# EAGLE board Motor (EAGLE 6.6.0)
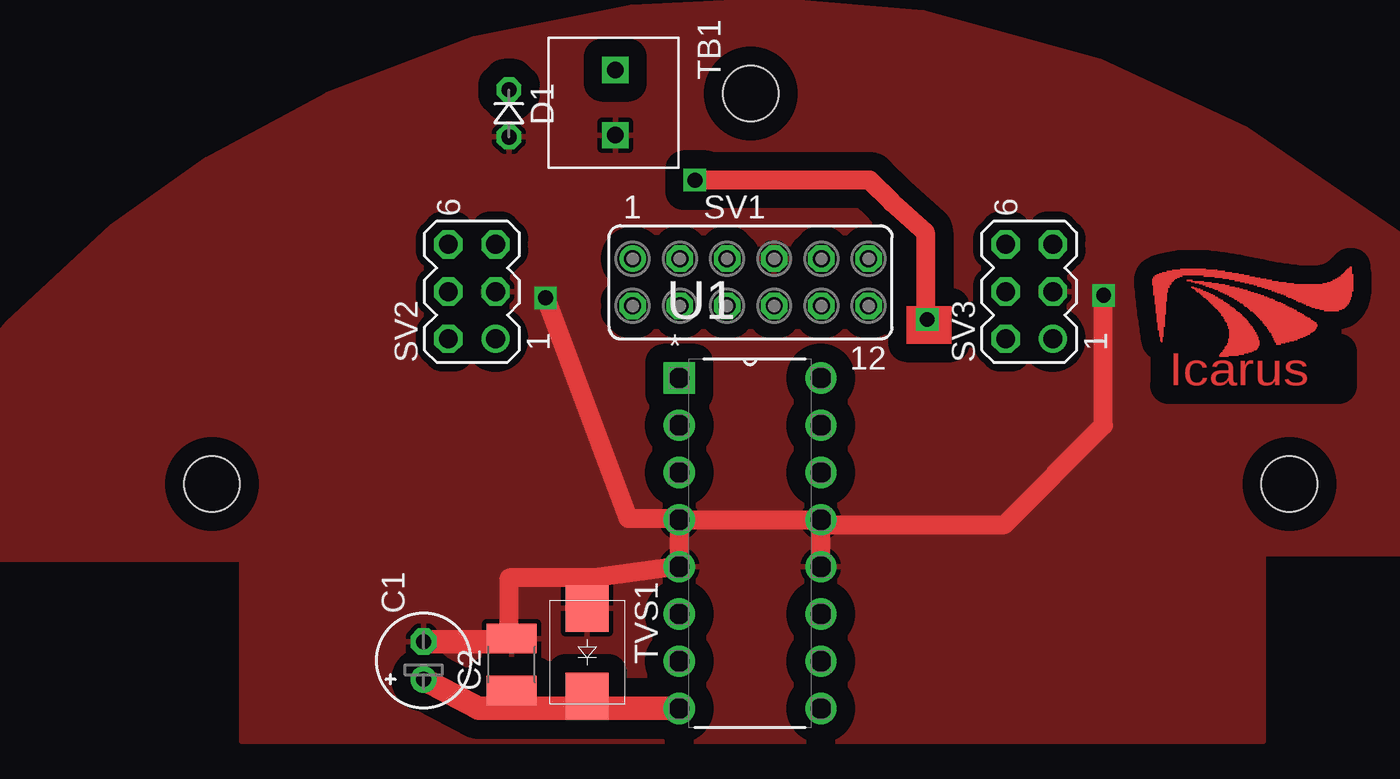
[diagram p0: board, top side]
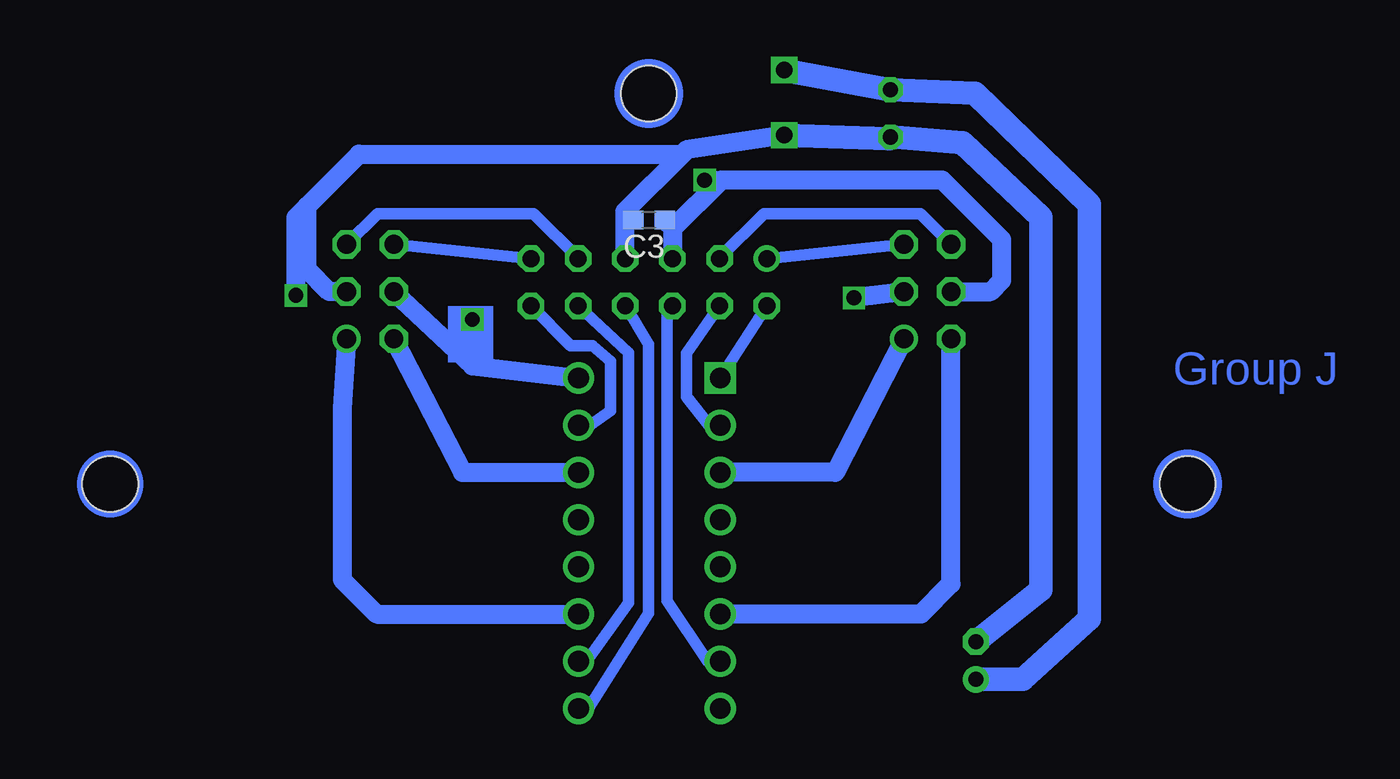
[diagram p1: board, bottom side, seen from below]

No outline drawn. Coordinates in mm, seen from the top.
Copper layers (1*16): Top 0.035mm / dielectric 1.5mm / Bottom 0.035mm
Design rules "default": minimum track width 10mil, minimum drill 24mil, track to track 8mil, track to pad 8mil, pad to pad 8mil, via to via 8mil, smd to smd 8mil, copper to edge 40mil, drill to drill 8mil, minimum pad ring 10mil, minimum via ring 8mil, stop-mask expansion 4mil, vias tented up to drill 0mil, thermal gap 10mil
Holes 3 mm at -29,22.65 29,22.65 0,43.65

## Footprints (pad centres in the part's own frame; a part is rotated, then mirrored left to right if it is on the bottom)
E2-5 = drill 0.813 pad 1.422: + -1.016,0 | drill 0.813 pad 1.422 octagon: - 1.016,0
C1210 = smd 1.6 x 2.7: 1 -1.4,0; 2 1.4,0
C0603 = smd 1.1 x 1: 1 -0.85,0; 2 0.85,0
D-2.5 = drill 0.813 octagon: A 1.27,0; C -1.27,0
FE06-2 = drill 0.914: 1 -6.35,1.27 | drill 0.914 octagon: 2 -6.35,-1.27; 3 -3.81,1.27; 4 -3.81,-1.27; 5 -1.27,1.27; 6 -1.27,-1.27; 7 1.27,1.27; 8 1.27,-1.27; 9 3.81,1.27; 10 3.81,-1.27; 11 6.35,1.27; 12 6.35,-1.27
MA03-2 = drill 1.016: 1 -2.54,-1.27 | drill 1.016 octagon: 2 -2.54,1.27; 3 0,-1.27; 4 0,1.27; 5 2.54,-1.27; 6 2.54,1.27
TERMINAL_BLOCK_2W = drill 0.9 square: P$1 1.75,3.6; P$2 5.25,3.6
SMBJA = smd 2.5 x 2.3: ANO -2.35,0; CAT 2.35,0
DIP254P762X508-16 = drill 1.118 square: 1 -7.62,17.78 | drill 1.118: 2 -7.62,15.24; 3 -7.62,12.7; 4 -7.62,10.16; 5 -7.62,7.62; 6 -7.62,5.08; 7 -7.62,2.54; 8 -7.62,0; 9 0,0; 10 0,2.54; 11 0,5.08; 12 0,7.62; 13 0,10.16; 14 0,12.7; 15 0,15.24; 16 0,17.78

## Placement (x,y rotation side)
C1  100u  [E2-5]  -17.6,13.15 90 top
C2  10u  [C1210]  -12.87,12.93 90 top
C3  [C0603]  0,36.85 180 bottom
D1  [D-2.5]  -13.01,42.59 270 top
SV1  [FE06-2]  0,33.5 0 top
SV2  [MA03-2]  -15,33 90 top
SV3  [MA03-2]  15,33 90 top
TB1  TERMINAL-BLOCK-2W  [TERMINAL_BLOCK_2W]  -10.88,46.67 270 top
TVS1  TVS_BIDIR  [SMBJA]  -8.8,13.6 270 top
U1  L293DNE  [DIP254P762X508-16]  3.78,10.57 0 top

## Library data of the parts
C1-C3 = adafruit
D1 = diode
SV1 = con-lsta; OC_FARNELL: unknown; OC_NEWARK: unknown
SV2 SV3 = con-lstb; OC_FARNELL: unknown; OC_NEWARK: unknown
TB1 TVS1 = GFL_Micromouse
U1 = GFL_Micromouse; MPN: L293DNE; OC_FARNELL: 1470423; OC_NEWARK: 06F9523; PACKAGE: PDIP-16; SUPPLIER: Texas Instruments

## Nets
+7V: C1.+ C2.1 D1.C TB1.P$1 TVS1.CAT U1.8
DIR1A: SV1.4 U1.2
DIR1B: SV1.6 U1.7
DIR2A: SV1.10 U1.10
DIR2B: SV1.12 U1.15
ENC1A: SV1.3 SV2.6
ENC1B: SV1.1 SV2.5
ENC2A: SV1.11 SV3.6
ENC2B: SV1.9 SV3.5
GND: C1.- C2.2 C3.2 D1.A SV1.7 SV2.3 SV3.3 TB1.P$2 TVS1.ANO U1.4 U1.5 U1.12 U1.13
MOTOR1+: SV2.2 U1.6
MOTOR1-: SV2.1 U1.3
MOTOR2+: SV3.2 U1.14
MOTOR2-: SV3.1 U1.11
PWM1: SV1.2 U1.1
PWM2: SV1.8 U1.9
VDD: C3.1 SV1.5 SV2.4 SV3.4 U1.16

## Tracks (layer width: path | path; a pad name or v marks a point on that pad's centre or on a via)
+7V
  Top 1.27: C1.+ -14.63,10.57 -13,10.57 | -13,10.57 -8.6,10.57 | -8.6,10.57 U1.8 | C2.1 -13,11.41 -13,10.57 | TVS1.CAT -8.6,11.65 -8.6,10.57
  Bottom 1.016: D1.C -12.94,43.86
  Bottom 1.27: -12.94,43.86 TB1.P$1 | D1.C -17.54,43.66 -23.7,37.7 -23.7,15.4 -20.14,12.14 C1.+
DIR1A
  Bottom 0.61: SV1.4 -2.03,29.7 -2.03,27.34 -3.23,25.81 U1.2
DIR1B
  Bottom 0.406: SV1.6 -0.97,32.22
  Bottom 0.61: -0.97,32.22 -0.97,16.37 -3.14,13.11 U1.7
DIR2A
  Bottom 0.61: SV1.10 1.09,29.7 1.09,16.26 3.36,13.11 U1.10
DIR2B
  Bottom 0.61: SV1.12 4.21,30.09 3.03,30.09 2.06,29.25 2.06,26.59 3.16,25.81 U1.15
ENC1A
  Bottom 0.61: SV2.6 -14.61,37.2 -6.2,37.2 -3.81,34.81 SV1.3
ENC1B
  Bottom 0.61: SV1.1 SV2.5
ENC2A
  Bottom 0.61: SV1.11 SV3.6
ENC2B
  Bottom 0.61: SV3.5 14.61,37.2 6.2,37.2 3.81,34.81 SV1.9
GND  (via drill 0.8)
  Top 0.406: -3.84,18 U1.5
  Top 1.016: U1.4 U1.13 3.78,20.47 | U1.5 U1.4 | U1.12 3.78,20.47 | v-11.04,32.66 -6.6,20.8 -3.91,20.8 U1.4 | -3.84,18 -4.04,18.2 -8.4,17.6 | -8.4,17.6 -13,17.6 -13,14.46 C2.2 | TVS1.ANO -8.4,17.6 | 3.78,20.47 13.67,20.47 19,25.8 v19,32.8
  Top 1.27: -13,14.46 -13.29,14.17 C1.-
  Bottom 1.016: -12.91,41.22 D1.A | SV2.3 -11.98,32.78 v-11.04,32.66 | TB1.P$2 -2.02,40.62 -1.8,40.4 | -1.8,40.4 1.3,37.3 | SV3.3 17.2,33 18.4,34.2 18.4,37.6 | 18.4,37.6 15.6,40.4 -1.8,40.4 | v19,32.8 19,37 18.4,37.6 | 1.3,37.3 1.3,34.8 | 1.3,37.3 C3.2
  Bottom 1.27: TB1.P$2 -12.91,41.22 | D1.A -16.88,41.02 -21.1,37 -21.1,16.96 C1.-
  pour Top (isolate 1): -48.8,18.6 -27.4,18.6 -27.4,8.8 27.6,8.8 27.6,18.9 48.7,18.9 44.2,26.57 36.1,35.27 26.7,41.7 18.8,45.4 9.3,48 1.3,48.7 -6.4,48.3 -14.9,46.6 -22.8,43.6 -29.3,40.1 -34.4,36.5 -40,31.3 -45,25.2
MOTOR1+
  Bottom 1.016: U1.6 -14.65,15.65 -16.27,17.27 SV2.2
MOTOR1-
  Bottom 1.016: SV2.1 -10.04,23.27 U1.3
MOTOR2+
  Bottom 1.016: SV3.2 10.04,23.27 U1.14
MOTOR2-
  Bottom 1.016: SV3.1 16.5,26.73 16.5,17.5 14.65,15.65 U1.11
PWM1
  Bottom 0.61: SV1.2 U1.1
PWM2
  Bottom 0.61: SV1.8 0.03,30.17 0.03,15.7 3.25,10.57 U1.9
VDD  (via drill 0.8)
  Top 1.016: v9.5,31.5 9.5,31 9.4,31.1 9.4,36.2 7.6,37.8 6.4,39 v-3,39 | v9.5,31.5
  Bottom 1.016: SV3.4 9.5,29.01 | 9.5,29.01 U1.16 | v9.5,31.5 9.5,29.01 | SV2.4 -18.4,33 -19,33.6 -19,35.8 -15.8,39 -3.9,39 | -3.9,39 -1.27,36.37 | -1.27,36.37 SV1.5 | C3.1 -1.27,36.43 -1.27,36.37 | v-3,39 -3.9,39
(copper drawn outside any net)
  shapes: Bottom area x1, Bottom circle x3, Top area x236

## Text on the board
Top: Icarus
Bottom: Group J